# Altium PCB GlassBoard.PcbDoc (part 2 of 2)
Units mil, origin at the board's own origin, x right, y up, seen from the top; angles counter-clockwise.
Board outline 2030 x 2020 mil, 4 copper layers (Top Layer, Plane (GND), Plane (PWR), Bottom Layer), stack 23.756 mil thick; 84 components, 48 nets, 261 pads, 94 vias.
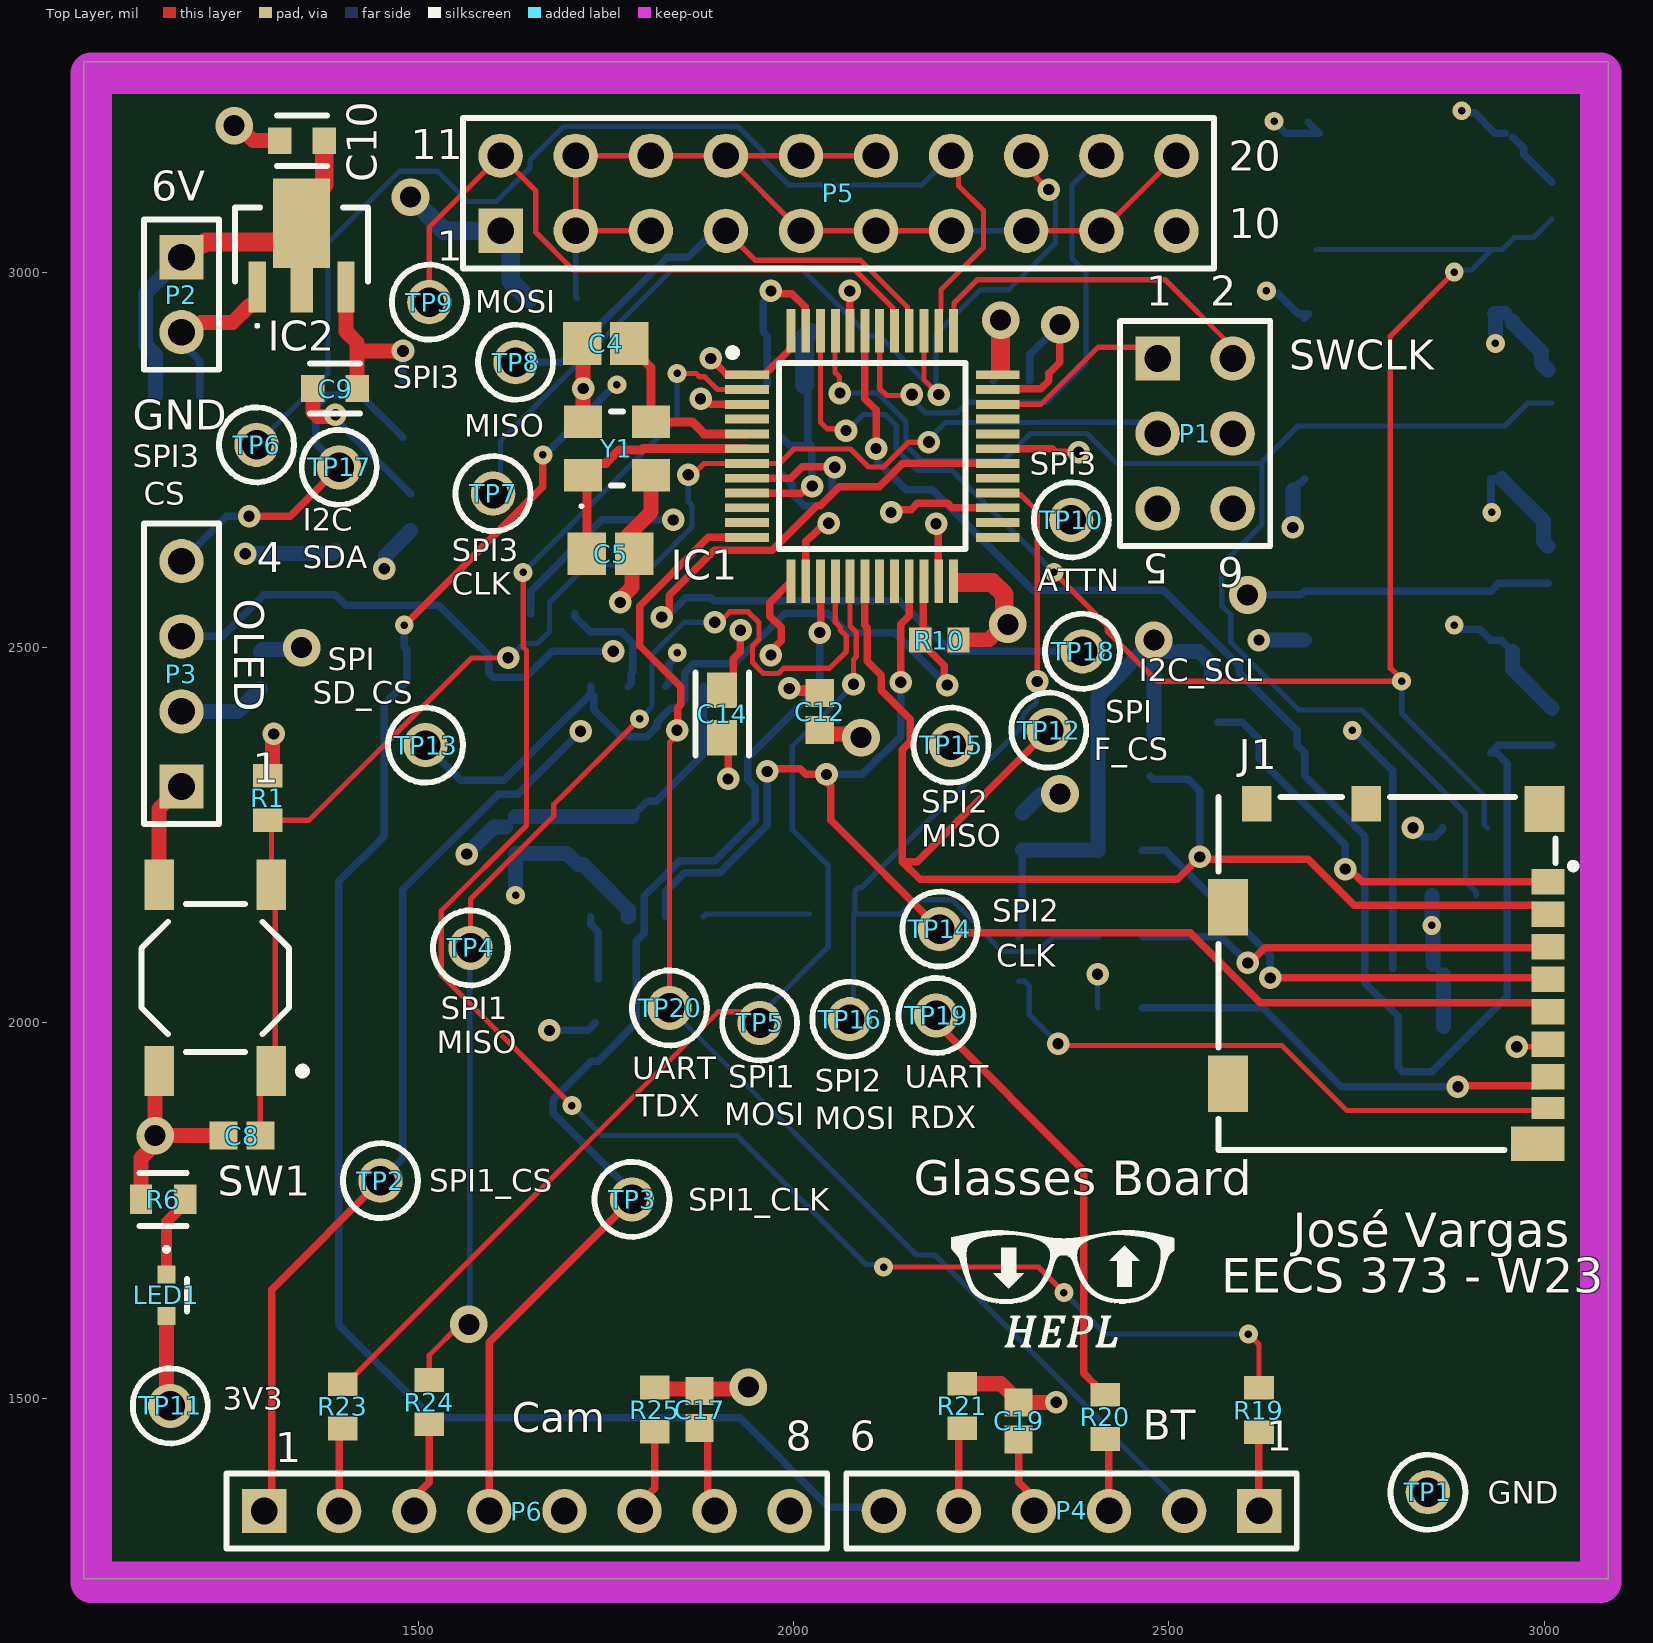
[diagram p0: Top Layer view]

## Silkscreen, mask and mechanical layers (free items; w line width, h text height) (continued)
Top Overlay: (continued)
  text "SDA" at 1346.46,2605.61 h30
  text "4" at 1285,2600 h40
  text "ATTN" at 2325,2575 h30
  text "CLK" at 1545,2570 h30
  text "OLED" at 1255,2565 h40 r270
  text "SPI" at 1380,2470 h30
  text "I2C_SCL" at 2460,2455 h30
  text "SD_CS" at 1360,2425 h30
  text "SPI" at 2415,2400 h30
  text "F_CS" at 2400,2350 h30
  text "1" at 1280,2320 h40
  text "SPI2" at 2170,2280 h30
  text "MISO" at 2170,2235 h30
  text "SPI2" at 2265,2135 h30
  text "CLK" at 2270,2075 h30
  text "SPI1" at 1530,2005 h30
  text "MISO" at 1525,1960 h30
  text "UART" at 1785,1925 h30
  text "SPI1" at 1913.08,1913.57 h30
  text "UART" at 2148.08,1913.57 h30
  text "SPI2" at 2028.08,1908.57 h30
  text "TDX" at 1790,1875 h30
  text "MOSI" at 1908.08,1863.57 h30
  text "RDX" at 2155,1860 h30
  text "MOSI" at 2028.08,1858.57 h30
  text "SPI1_CS" at 1515,1775 h30
  text "Glasses Board" at 2160.07,1755.29 h78.74
  text "SPI1_CLK" at 1860,1750 h30
  text "José Vargas" at 2665,1686.3 h78.74
  text "EECS 373 - W23" at 2570,1625.29 h78.74
  text "3V3" at 1240,1485 h30
  text "Cam" at 1625,1455 h40
  text "BT" at 2465,1445 h40
  text "8" at 1990,1430 h40
  text "6" at 2075,1430 h40
  text "1" at 2630,1430 h40
  text "1" at 1310,1415 h40
  text "GND" at 2925,1360 h30

## Text inside footprints (layer, text, board x,y; h text height)
P1: Top Overlay "6" at 2600,2620 h40 r180; Top Overlay "2" at 2555,2955 h40; Top Overlay "1" at 2470,2955 h40; Top Overlay "5" at 2500,2625 h40 r180
P5: Top Overlay "20" at 2580,3135 h40; Top Overlay "10" at 2580,3045 h40; Top Overlay "1" at 1490,3150 h40; Top Overlay "1" at 1525,3015 h40; Top Overlay "1" at 1525,3150 h40